# Altium PCB PCB1.PcbDoc
Units mm, origin at the board's own origin, x right, y up, seen from the top; angles counter-clockwise.
Board outline 53.21 x 19.56 mm, 2 copper layers (Top Layer, Bottom Layer); 60 components, 38 nets, 218 pads, 76 vias.
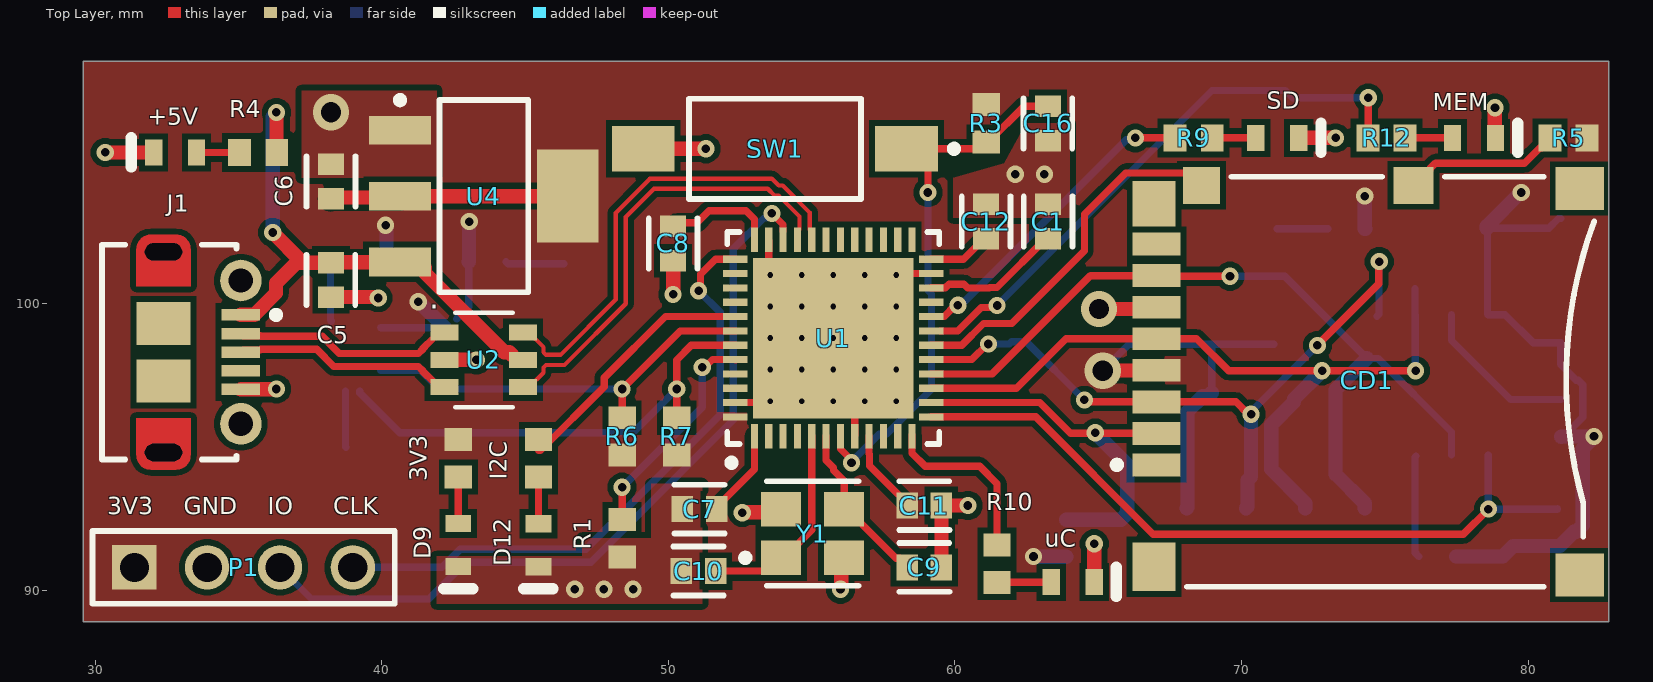
[diagram p0: Top Layer view]
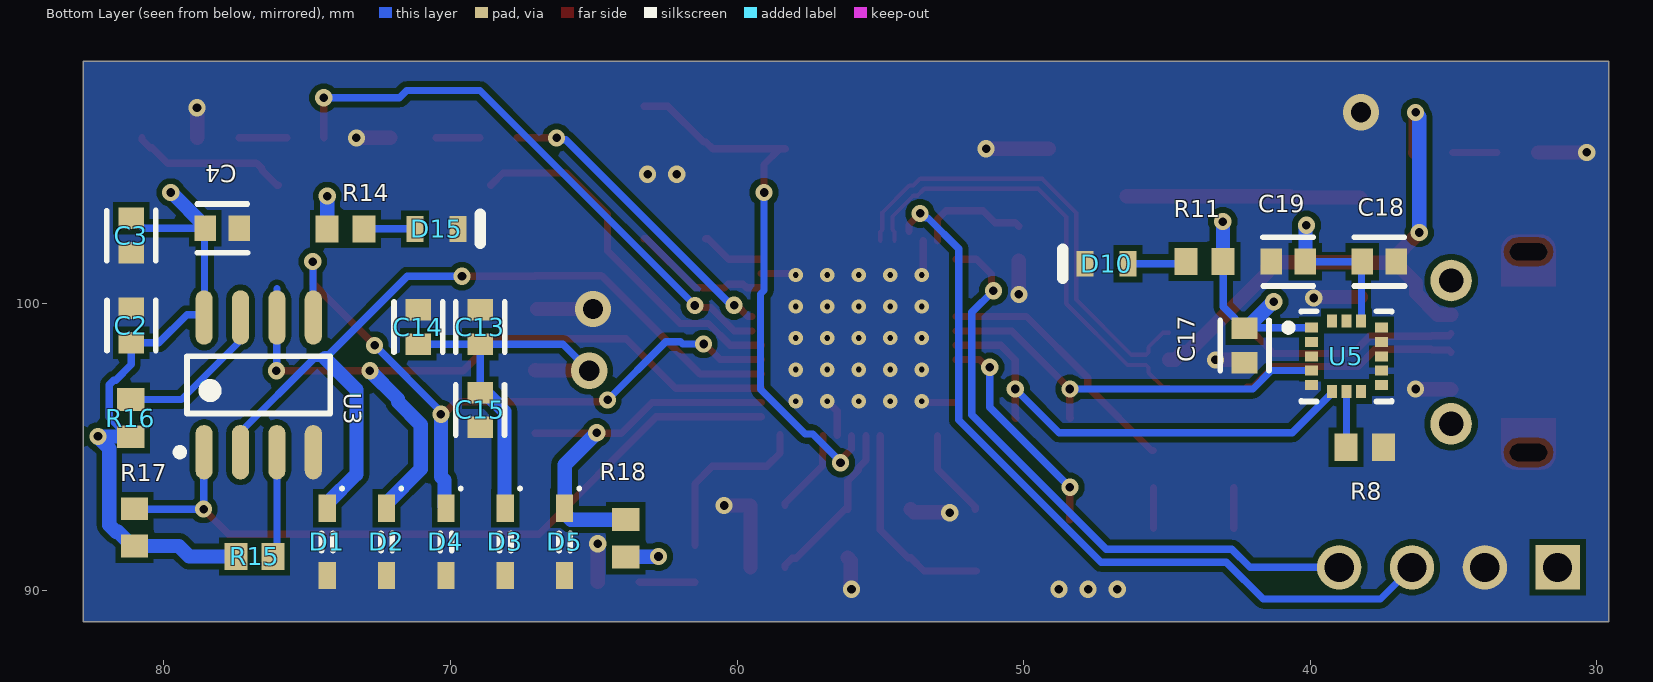
[diagram p1: Bottom Layer view, seen from below]
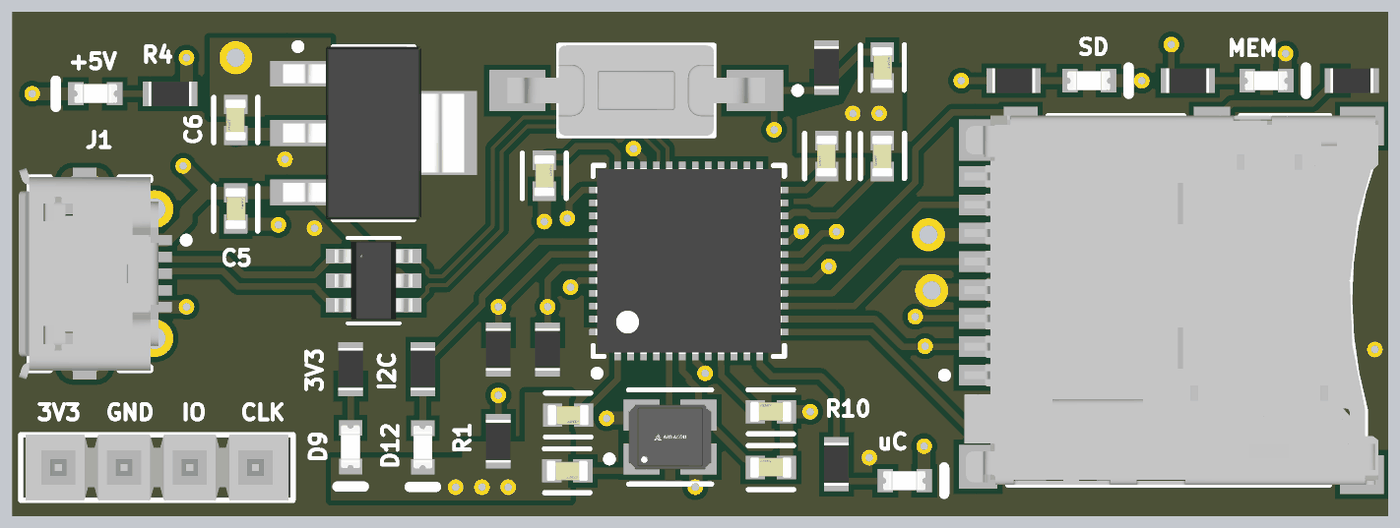
[diagram p2: 3D render of the assembled board from above, using the file's embedded part models]
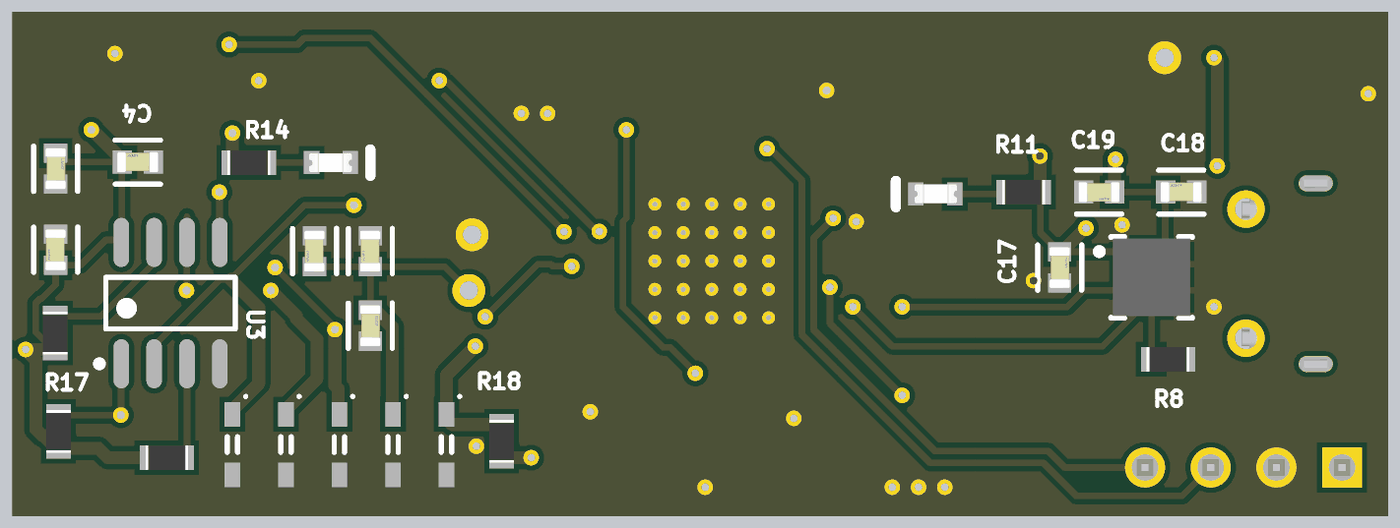
[diagram p3: 3D render of the assembled board from below, using the file's embedded part models]

## Layer stack, top to bottom
Top Solder: solder mask 0.0102, Solder Resist, Dk 3.5
Top Layer: signal copper 0.0356
Dielectric 1: dielectric 0.32, FR-4, Dk 4.8
Bottom Layer: signal copper 0.0356
Bottom Solder: solder mask 0.0102, Solder Resist, Dk 3.5

## Board outline
29.591,108.458 82.804,108.458 82.804,88.9 29.591,88.9

## Design rules (kind name [scope] priority, off if disabled: settings)
Clearance [All] p1: gap=0.2 ignorepadtopadclearanceinfootprint=FALSE except(0: Arc-Hole Track-Hole SMDPad-Hole THPad-Hole Via-Hole Fill-Hole Poly-Hole Region-Hole Text-Hole; 0.15: Arc-SMDPad Track-SMDPad SMDPad-SMDPad)
DiffPairsRouting [All] p1: maxlimit=0.254 minlimit=0.15 mostfreqgap=0.2 toplayer_minwidth=0.15 toplayer_maxwidth=0.381 toplayer_prefwidth=0.254 bottomlayer_minwidth=0.15 bottomlayer_maxwidth=0.381 bottomlayer_prefwidth=0.254 maxuncoupledlength=12.7
MinimumSolderMaskSliver [All] p1: minsoldermaskwidth=0.15
PolygonConnect [All] p1: connectstyle=Direct reliefconductorwidth=0.254 reliefentries=4 polygonreliefangle="90 Angle" airgapwidth=0.254
RoutingVias [All] p1: holewidth=0.3 width=0.6 viastyle="Through Hole" minholewidth=0.3 minwidth=0.6 maxholewidth=0.3 maxwidth=0.6 viatemplateguid#1={E1997C0E-6A4B-44C1-AED1-B057834B2BD9} viatemplatename#1=v50h20
SilkToSolderMaskClearance [IsPad] p1: minsilkscreentomaskgap=0.15 clearancetoexposedcopper=TRUE
SolderMaskExpansion [All] p1: expansion=0 istentingtop=FALSE
Width [All] p1: maxlimit=10 minlimit=0.254 preferedwidth=0.254 minimp=50.000000 maximp=50.000000 favimp=50.000000
27 further rules are at their usual default settings.

## Classes and differential pairs
component class Sheet2: C17 C18 C19 D10 D12 D15 I2C MEM R6 R7 R8 R9 R10 R11 R12 R14 SD U5 uC
component class Sheet1: 3V3 +5V C1 C2 C3 C4 C5 C6 C7 C8 C9 C10 C11 C12 C13 C14 C15 C16 CD1 D1 D2 D3 D4 D5 D9 J1 P1 R1 R3 R4 R5 R15 R16 R17 R18 SW1 U1 U2 U3 U4 Y1
differential pair USB: +USB_P -USB_N
differential pair USB_CONN: +USB_CONN_P -USB_CONN_N

## Components (designator, comment, footprint, x,y, rotation, side; value= is the part's Value field where it differs from the comment)
3V3 "1k" RESC1609X50X30NL8T20 42.672,94.615 r90 top (schematic designator R2)
+5V "0603 LED" "0603 LED" 32.791,105.283 r180 top (schematic designator D8)
C1 "2.2u" FP-C0603C-CF-MFG 63.246,102.87 r90 top value="0.10 μF"
C2 "0.1u" FP-C0603C-CF-MFG 81.134,99.241 r90 bottom value="0.10 μF"
C3 "0.1u" FP-C0603C-CF-MFG 81.134,102.381 r270 bottom value="0.10 μF"
C4 "0.1u" FP-C0603C-CF-MFG 77.959,102.635 r180 bottom value="0.10 μF"
C5 "0.1u" FP-C0603C-CF-MFG 38.227,100.838 r270 top value="0.10 μF"
C6 "10u" FP-C0603C-CF-MFG 38.227,104.267 r90 top value="0.10 μF"
C7 "0.1u" FP-C0603C-CF-MFG 51.089,92.837 r180 top value="0.10 μF"
C8 "0.1u" FP-C0603C-CF-MFG 50.165,102.108 r270 top value="0.10 μF"
C9 "26p" FP-C0603C-CF-MFG 58.928,90.805 r0 top value="0.10 μF"
C10 "26p" FP-C0603C-CF-MFG 51.054,90.678 r180 top value="0.10 μF"
C11 "0.1u" FP-C0603C-CF-MFG 58.928,92.964 r0 top value="0.10 μF"
C12 "0.1u" FP-C0603C-CF-MFG 61.087,102.87 r90 top value="0.10 μF"
C13 "0.1u" FP-C0603C-CF-MFG 68.961,99.187 r90 bottom value="0.10 μF"
C14 "0.1u" FP-C0603C-CF-MFG 71.12,99.187 r90 bottom value="0.10 μF"
C15 "0.1u" FP-C0603C-CF-MFG 68.961,96.301 r270 bottom value="0.10 μF"
C16 "0.1u" FP-C0603C-CF-MFG 63.246,106.299 r270 top value="0.10 μF"
C17 "0.1u" FP-C0603C-CF-MFG 42.291,98.552 r270 bottom value="0.10 μF"
C18 "0.1u" FP-C0603C-CF-MFG 37.592,101.473 r180 bottom value="0.10 μF"
C19 "0.1u" FP-C0603C-CF-MFG 40.767,101.473 r0 bottom value="0.10 μF"
CD1 "502774-0891" MOLX-502774-0891_V 74.422,97.282 r90 top
D1 "DESD5V0U1BA-7" SOD-323 74.295,91.694 r90 bottom
D2 "DESD5V0U1BA-7" SOD-323 72.225,91.694 r90 bottom
D3 "DESD5V0U1BA-7" SOD-323 68.085,91.694 r90 bottom
D4 "DESD5V0U1BA-7" SOD-323 70.155,91.694 r90 bottom
D5 "DESD5V0U1BA-7" SOD-323 66.015,91.694 r90 bottom
D9 "0603 LED" "0603 LED" 42.672,91.591 r270 top
D10 "0603 LED" "0603 LED" 47.105,101.399 r0 bottom
D12 "0603 LED" "0603 LED" 45.466,91.579 r270 top
D15 "0603 LED" "0603 LED" 70.485,102.616 r180 bottom
I2C "100" RESC1609X50X30NL8T20 45.466,94.615 r90 top (schematic designator R13)
J1 "105017-0001" USB-MICRO-B_V 33.735,98.314 r270 top
MEM "0603 LED" "0603 LED" 78.105,105.791 r0 top (schematic designator D11)
P1 "MTSW-104-07-F-S-170" SMTC-MTSW-104-07-X-S-170 31.369,90.805 r0 top
R1 "10k" RESC1609X50X30NL8T20 48.387,91.821 r270 top
R3 "10k" RESC1609X50X30NL8T20 61.087,106.299 r270 top
R4 "1k" RESC1609X50X30NL8T20 35.687,105.283 r0 top
R5 "4.7k" RESC1609X50X30NL8T20 81.407,105.791 r0 top
R6 "4k7" RESC1609X50X30NL8T20 48.387,95.377 r270 top
R7 "4k7" RESC1609X50X30NL8T20 50.292,95.377 r270 top
R8 "10k" RESC1609X50X30NL8T20 38.1,94.996 r0 bottom
R9 "100" RESC1609X50X30NL8T20 68.326,105.791 r180 top
R10 "100" RESC1609X50X30NL8T20 61.468,90.932 r90 top
R11 "100" RESC1609X50X30NL8T20 43.688,101.473 r180 bottom
R12 "100" RESC1609X50X30NL8T20 75.057,105.791 r180 top
R14 "100" RESC1609X50X30NL8T20 73.66,102.616 r0 bottom
R15 "10k" RESC1609X50X30NL8T20 76.835,91.186 r0 bottom
R16 "10k" RESC1609X50X30NL8T20 81.153,96.012 r270 bottom
R17 "4.7k" RESC1609X50X30NL8T20 81.026,92.202 r270 bottom
R18 "4.7k" RESC1609X50X30NL8T20 63.881,91.821 r270 bottom
SD "0603 LED" "0603 LED" 71.247,105.791 r0 top (schematic designator D13)
SW1 "FSMSMTR" TECO-FSMSMTR_V 53.721,105.41 r180 top
U1 "STM32F401CBU6TR" "UQFN48 P0.5mm" 55.753,98.806 r90 top
U2 "USBLC6-2SC6" SOT23-6L_STM 43.561,98.044 r0 top
U3 "FLASH 1MBit" "SOIC8 3.9mm" 76.689,97.174 r90 bottom
U4 "LD1117S33TR" SOT230P700X180-4N 43.561,103.759 r0 top
U5 "LIS3DHTR" FP-LGA-16-7983231-MFG 38.735,98.171 r180 bottom
uC "0603 LED" "0603 LED" 64.11,90.297 r0 top (schematic designator D14)
Y1 "ABM8G-16.000MHZ-18-D2Y-T" FP-ABM8G-MFG 55.034,91.987 r0 top

## Footprints (in the part's own frame and the unit in brackets; to place one, negate y for a bottom-side part, rotate by r counter-clockwise, add the part's x,y. Pads: shape width x height; smd on the part's side, far side on the other; paste and mask are expansions set on the pad)
"0603 LED" [mm]
  rect 0.6x0.9 smd: 1(-0.75,0) 2(0.75,0)
  silkscreen extent 1.52,-0.51 1.52,0.51, body extent -0.84,-0.37 0.81,0.36, height 0.68
FP-ABM8G-MFG [mm]
  rect 1.4x1.2 smd paste+0 mask+0: 1(-1.1,-0.85) 2(1.1,-0.85) 3(1.1,0.85) 4(-1.1,0.85)
  silkscreen extent -2.47,-1.83 1.6,1.83, body extent -1.9,-1.55 1.9,1.55, height 0.25
FP-C0603C-CF-MFG [mm]
  rect 0.75x0.9 smd paste+0 mask+0: 1(-0.6,0) 2(0.6,0)
  silkscreen extent -0.87,-0.85 0.88,0.85, body extent -1.2,-0.6 1.2,0.6, height 0.25
FP-LGA-16-7983231-MFG [mm]
  rect 0.45x0.35 smd paste-1000 mask+0: 1(-1.225,1) 2(-1.225,0.5) 3(-1.225,0) 4(-1.225,-0.5) 5(-1.225,-1) 9(1.225,-1) 10(1.225,-0.5) 11(1.225,0) 12(1.225,0.5) 13(1.225,1)
  rect 0.35x0.45 smd paste-1000 mask+0: 6(-0.5,-1.225) 7(0,-1.225) 8(0.5,-1.225) 14(0.5,1.225) 15(0,1.225) 16(-0.5,1.225)
  silkscreen extent -2.15,-1.58 1.58,1.58, body extent -1.5,-1.5 1.5,1.5, height 1
MOLX-502774-0891_V [mm] "SMD, 14-Leads, Body 15x14.3mm, Pitch 1.1mm"
  rect 0.8x1.68 smd: 1(-2.9,7.385) 2(-1.8,7.385) 3(-0.7,7.385) 4(0.4,7.385) 5(1.5,7.385) 6(2.6,7.385) 7(3.7,7.385) 8(4.8,7.385)
  rect 1.29x1.3 smd: 9(6.855,5.825)
  rect 1.29x1.4 smd: 10(6.855,-1.575)
  rect 1.5x1.7 smd: 11(6.75,-7.375) 12(-6.75,-7.375)
  rect 1.7x1.5 smd: 13(-6.45,7.475)
  rect 1.6x1.5 smd: 14(6.21,7.475)
  silkscreen extent -7.15,-7.88 7.15,8.9, body extent -7.15,-8 7.15,8, height 1.78
RESC1609X50X30NL8T20 [mm] "Chip Resistor, 2-Leads, Body 1.65x0.95mm, IPC Medium Density"
  rect 0.8x0.95 smd: 1(-0.65,0) 2(0.65,0)
  body extent -0.82,-0.48 0.82,0.48, height 0.5
SMTC-MTSW-104-07-X-S-170 [mm] "Assembly .025\" [.64] SQ Post Terminal Strip, 1x4 Pins, Vertical, 2.54mm Pitch, Male"
  rect 1.55x1.55 hole 1.02: 1(0,0)
  round 1.55 hole 1.02: 2(2.54,0) 3(5.08,0) 4(7.62,0)
  silkscreen extent -1.46,-1.27 9.08,1.27, body extent -1.27,-1.27 8.89,1.27, height 6.86
SOD-323 [mm] "Chip Diode, 2-Leads, Body 2.70x0.45mm, IPC Medium Density"
  rect 0.95x0.6 smd: 1(-1.175,0) 2(1.175,0)
  silkscreen extent -0.3,-0.56 1.91,0.2, body extent -1.3,-0.67 1.3,0.67, height 1.1
"SOIC8 3.9mm" [mm]
  oval 1.9x0.6 smd: 1(-2.35,1.905) 2(-2.35,0.635) 3(-2.35,-0.635) 4(-2.35,-1.905) 5(2.35,-1.905) 6(2.35,-0.635) 7(2.35,0.635) 8(2.35,1.905)
  silkscreen extent -2.47,-2.5 1,2.88, body extent -3,-2.45 3,2.45, height 1.75
SOT23-6L_STM [mil]
  rect 38.5x22 smd paste+0 mask+0: 1(-53.75,37.4) 2(-53.75,0) 3(-53.75,-37.4) 4(53.75,-37.4) 5(53.75,0) 6(53.75,37.4)
  silkscreen extent -40,-65 40,65, body extent -59,-60 59,60, height 57
SOT230P700X180-4N [mm] "SOT223, 4-Leads, Body 6.50x7.00mm (avg), Pitch 2.30mm, IPC Medium Density"
  rect 2.15x1 smd: 1(-2.925,2.3) 2(-2.925,0) 3(-2.925,-2.3)
  rect 2.15x3.25 smd: 4(2.925,0)
  silkscreen extent -3.05,-3.35 1.55,3.47, body extent -3.5,-3.35 3.5,3.35, height 1.8
TECO-FSMSMTR_V [mm] "SMD, 2-Leads, Body 6x3.5mm, Pitch 9.19mm"
  rect 2.2x1.6 smd: 1(-4.595,0)
  rect 2.18x1.6 smd: 2(4.595,0)
  silkscreen extent -6.37,-1.75 3,1.75, body extent -4.98,-1.75 4.98,1.75, height 4.4
"UQFN48 P0.5mm" [mm] "QFN, 48-Leads, Body 7.00x7.00mm, Pitch 0.50mm, Thermal Pad 5.60x5.60mm, IPC Medium Density"
  rect 0.85x0.25 smd: 1(-3.425,2.75) 2(-3.425,2.25) 3(-3.425,1.75) 4(-3.425,1.25) 5(-3.425,0.75) 6(-3.425,0.25) 7(-3.425,-0.25) 8(-3.425,-0.75) 9(-3.425,-1.25) 10(-3.425,-1.75) 11(-3.425,-2.25) 12(-3.425,-2.75) 25(3.425,-2.75) 26(3.425,-2.25) 27(3.425,-1.75) 28(3.425,-1.25) 29(3.425,-0.75) 30(3.425,-0.25) 31(3.425,0.25) 32(3.425,0.75) 33(3.425,1.25) 34(3.425,1.75) 35(3.425,2.25) 36(3.425,2.75)
  rect 0.25x0.85 smd: 13(-2.75,-3.425) 14(-2.25,-3.425) 15(-1.75,-3.425) 16(-1.25,-3.425) 17(-0.75,-3.425) 18(-0.25,-3.425) 19(0.25,-3.425) 20(0.75,-3.425) 21(1.25,-3.425) 22(1.75,-3.425) 23(2.25,-3.425) 24(2.75,-3.425) 37(2.75,3.425) 38(2.25,3.425) 39(1.75,3.425) 40(1.25,3.425) 41(0.75,3.425) 42(0.25,3.425) 43(-0.25,3.425) 44(-0.75,3.425) 45(-1.25,3.425) 46(-1.75,3.425) 47(-2.25,3.425) 48(-2.75,3.425)
  rect 5.6x5.6 smd: 49(0,0)
  silkscreen extent -4.47,-3.7 3.7,3.7, body extent -3.6,-3.6 3.6,3.6, height 0.6
USB-MICRO-B_V [mm] "USB, MICRO B, Body 7.491x4.695 mm, Pitch 0.65 mm"
  rect 0.4x1.35 smd: 1(-1.3,1.35) 2(-0.65,1.35) 3(0,1.35) 4(0.65,1.35) 5(1.3,1.35)
  round 1.45 hole 0.85: 6(-2.5,1.35) 7(2.5,1.35)
  rrect50% 0x0 hole 0.6 slot 1.3 at 90 deg: 8(-3.5,-1.35) 11(3.5,-1.35)
  rect 1.5x1.9 smd: 9(-1,-1.35) 10(1,-1.35)
  Top Layer circle w0.5: c-3.6,-1.8 r0.25
  Top Layer circle w0.5: c-3.6,-0.9 r0.25
  Top Layer circle w0.5: c3.6,-1.8 r0.25
  Top Layer circle w0.5: c3.6,-0.9 r0.25
  Top Layer region: -3.6,-1.8 -3.6,-0.9 -4.1,-0.9 -4.1,-1.8
  Top Layer region: 3.6,-0.9 3.6,-1.8 4.1,-1.8 4.1,-0.9
  Top Layer region: 2.3,-0.4 2.3,-2.3 3.6,-2.3 3.6,-0.4
  Top Layer region: -2.3,-2.3 -2.3,-0.4 -3.6,-0.4 -3.6,-2.3
  silkscreen extent -3.75,-3.5 3.75,2.7, body extent -4.1,-3.9 4.1,1.5, height 2.67

## Part data
3V3 I2C R1 R3 R4 R5 R6 R7 R8 R9 R10 R11 R12 R14 R15 R16 R17 R18: library part CMP-1666-00005-4, "Chip Resistor, 10 KOhm, +/- 1%, 100 mW, -55 to 155 degC, 0603 (1608 Metric), RoHS, Tape and Reel", Manufacturer="Vishay Semiconductor", Max Operating Temperature="155 degC", Min Operating Temperature="-55 degC", Package Quantity=5000, Voltage Rating="75 V", ComponentLink1Description="Manufacturer URL", ComponentLink1URL=http://www.vishay.com/, ComponentLink2Description=Datasheet, ComponentLink2URL=https://datasheet.ciiva.com/11809/0900766b80d98afc-11809037.pdf, DatasheetVersion=06/2012, Height="0.45 mm", Length="1.55 mm", Mounting Technology="Surface Mount", PackageDescription="2-Pin Surface Mount Device, Body 1.575 x 0.85 mm", PackageReference=0603, Packaging="Tape and Reel", REACH SVHC=Unknown, RoHSCompliant=true
C1 C2 C3 C4 C5 C6 C7 C8 C9 C10 C11 C12 C13 C14 C15 C16 C17 C18 C19: library part CMP-2006-03061-2, "CAP CER 0.1UF 50V X7R 0603", Capacitance="0.10 μF", Manufacturer=KEMET, Manufacturer Part Number=C0603C104K5RACTU, Package=C0603C-CF, Temperature="-55°C to +125°C", Temperature Characteristic=X7R, Temperature Coefficient=30ppm/°C, Temperature Range High=+125°C, Temperature Range Low=-55°C, Tolerance=0.1, Voltage Rating="50 V", Automotive=Yes, Automotive Grade="Grade 1", Category=Cap, ComponentLink2Description=Datasheet, ComponentLink2URL=https://api.kemet.com/component-edge/download/datasheet/C0603C100J5GACAUTO.pdf, Device Class L1="Passive Components", Device Class L2=Capacitors, Device Class L3="Ceramic Capacitors", Digikey Description="CAP CER 0.1UF 50V X7R 0603", Height=0.87mm, Lead Free=Yes, Material=Ceramic, Octopart=https://octopart.com/c0603c104k5ractu-kemet-139244, RoHS=TRUE
CD1: library part CMP-2000-05248-1, "Micro SD Memory Card Connector, 0.5 A, 10 V (DC), -25 to 85 degC, 8-Pin SMT, RoHS, Tape and Reel", Manufacturer=Molex, Standard Package=1, 3D Model=502774-0891.stp, Card Type=SecureDigital-microSD™, Catalog Drawings=502774-0891, Category=Connectors,Interconnects, Connector Type=ConnectorandEjector, Contact Finish=Gold, Contact Finish Thickness=20µin(0.51µm), Datasheet URL=https://datasheet.ciiva.com/1104/1499551-1104671.pdf, Datasheet Version="Rev. D, 04/2004", Ejector Side=-, Family=MemoryConnectors-PCCardSockets, Features=Switch, Height Above Board="0.071\"(1.80mm)", Insertion, Removal Method=PushIn,PushOut, Manufacturer URL=http://www.molex.com/, Mounting Feature=Reverse-Bottom, Mounting Type=SurfaceMount,RightAngle, Number of Positions=10(8+2), Online Catalog=microSD™Series, Other Names=WM24066DKR, Packaging=Digi-Reel, RoHS Information=502774-0891CertofCompliance, Series=502774
D1 D2 D3 D4 D5: "No Description Available", Mfr_Name="Diodes Inc", Copyright="Copyright (C) 2023 Ultra Librarian. All rights reserved.", Manufacturer_Part_Number=DESD5V0U1BA-7, RefDes=RefDes, Type=DEV
J1: library part CMP-2000-05827-1, "Micro-USB B Receptacle, Right Angle, Bottom Mount, Surface Mount, with Solder Tabs, -30 to 85 degC, 5-Pin USB, RoHS, Tape and Reel", Manufacturer=Molex, Package Description="5-Leads USB, Micro B, Body 7.5 x 5 mm, Pitch 0.65 mm", Package Reference=MICRO-B, Package Version="Rev. F, 12/2012", Standard Package=1, Voltage - Max=30V, 3D Model=105017-0001.stp, Catalog Drawings=1050170001, Category=Connectors,Interconnects, Circuits=5, Connector Type=USB-microB, Datasheet URL=http://www.molex.com/elqNow/elqRedir.htm?ref=http://www.molex.com/webdocs/datasheets/pdf/en-us/1050170001_IO_CONNECTORS.pdf, Datasheet Version=03/2016, Family=USB,DVI,HDMIConnectors, Featured Product=Micro-USBConnectorsUSBConnectors, Features=Shielded,SolderRetention, Gender=Receptacle, Ingress Protection=-, Manufacturer URL=http://www.molex.com/, Mating Products=WM17145-ND-CABLEMICROUSBBTOSTDA1.0MWM17147-ND-CABLEMICROUSBBTOSTDA2.0MWM17146-ND-CABLEMICROUSBBTOSTDA1.5M, Mounting Technology=SurfaceMount, Mounting Type=BoardCutout,SurfaceMount,RightAngle, Number of Contacts=5, Online Catalog=Molex-MicroUSB, Other Names=WM1399DKR, Package URL=http://www.molex.com/pdm_docs/sd/1050170001_sd.pdf, Packaging=Digi-Reel®, PCN Assembly/Origin=ResinSupplier21/Oct/2015, RoHS Information=1050170001CertofCompliance, Series=-, Specifications=-
P1: library part CMP-1024-00106-1, "Modified .025\" SQ Post Header, Through-hole, Vertical, -55 to 125 degC, 2.54 mm Pitch, 4-Pin, Male, RoHS", Manufacturer=Samtec, Temperature Range="-55 to 125 degC", ComponentLink1Description="Manufacturer URL", ComponentLink1URL=http://www.samtec.com, ComponentLink2Description=Datasheet, ComponentLink2URL=http://www.samtec.com/documents/webfiles/pdf/MTSW.PDF, ComponentLink3Description="Package Specification", ComponentLink3URL=http://www.samtec.com/documents/webfiles/cpdf/MTSW-XXX-XX-X-X-XXXX-XX-XXX-MKT1.pdf, DatasheetVersion=F-214, Mounting Technology=Through-hole, Orientation=Vertical, PackageDescription="Assembly .025\" [.64] SQ Post Terminal Strip", PackageReference=MTSW-104-07-X-S-170, PackageVersion="BI, 2/1987", PartNumber=MTSW-104-07-F-S-170, Pitch="2.54 mm", RoHS=True
SW1: library part CMP-2000-07501-1, "FSMSM Push Button Switch, 50 mA, -35 to 85 degC, 2-Pin SMD, RoHS, Tape and Reel", Case\/Package=SMD/SMT, Contact Current Rating=50mA, Contact Resistance=100mOhm, Manufacturer="TE Connectivity", Max Operating Temperature=85degC, Max Voltage Rating (DC)=12V, Min Operating Temperature=-35degC, Operating Force=180gf, Package Description="2-Pin Surface Mount Device, Body 6 x 3.5 mm, Pitch 9.19 mm", Package Quantity=1800, Voltage Rating (DC)=24V, Actuator Length=1.07mm, Actuator Material=Polyamide, Contact Material=Brass, Contact Plating=Silver, Current Rating=50mA, Datasheet URL=http://www.te.com/commerce/DocumentDelivery/DDEController?Action=showdoc&DocId=Customer+Drawing%7F1437566-3%7FC2%7Fpdf%7FEnglish%7FENG_CD_1437566-3_C2_1437566_3_1_c.dwg.pdf%7F1437566-4, Datasheet Version="Rev. C2, 08/2014", Electrical Life=20000Cycles, ELV=Compliant, Illumination Type=Illuminated, Lead Free=LeadFree, Manufacturer URL=http://www.te.com/, Mechanical Life=20000Cycles, Mount=SurfaceMount, Mounting Technology=SurfaceMount, Orientation=Straight, Package Reference=FSMSMTR, Packaging=TapeandReel, REACH SVHC=Unknown, RoHSCompliant=true, Switch Travel=0.25mm, Termination=GullWing, Throw Configuration=SPST
U1: library part CMP-0243-00136-1, "ARM Cortex-M4 32-bit MCU+FPU, 128 KB Flash, 64 KB Internal RAM, 36 I/Os, 48-Pin UFQFPN, -40 to 85 degC, Tape and Reel", I/Os (High Current)=36, Manufacturer=STMicroelectronics, Operating Frequency(F) (Processor speed) (MHz)=84, Package Description=UFQFPN48, Package Reference="48-Pin Ultra Thin Fine Pitch Quad Flat No-Lead, 7 x 7 x 0.6 mm Body, 0.5 mm Pitch, Exposed Pad", Supply Voltage(Vcc) min (V)=1.7, ComponentLink1Description="Manufacturer URL", ComponentLink1URL=http://www.st.com/, ComponentLink2Description=Datasheet, ComponentLink2URL=http://www.st.com/st-web-ui/static/active/en/resource/technical/document/datasheet/DM00086815.pdf, Core="ARM Cortex-M4", DatasheetVersion="Rev. 5", FLASH Size (Prog) (kB)=128, Internal RAM Size (kB)=64, Manufacturer Part Number=STM32F401CBU6TR, Mounting Technology="Surface Mount", Packing="Tape and Reel"
U2: "No Description Available", Mfr_Name=STMicroelectronics, Copyright="Copyright (C) 2023 Ultra Librarian. All rights reserved.", Manufacturer_Part_Number=USBLC6-2SC6, RefDes=RefDes, Type=DEV
U3: library part SST25VF010A-33-4I-SAE
U4: "Fixed Positive LDO Regulator, 3.3V, 1.2V Dropout, BIPolar, PDSO4", Case/Package=SOP, Dropout Voltage1-Max=1.2V, Dropout Voltage1-Nom=1.1V, Input Voltage Absolute-Max=15V, Manufacturer=STMicroelectronics, Min Input Voltage=4.75V, Operating Temperature, TJ-Max=125°C, Operating Temperature, TJ-Min=0°C, Output Current1-Max=1.3A, Output Voltage1-Max=3.365V, Output Voltage1-Min=3.235V, Output Voltage1-Nom=3.3V, Package Body Material=Plastic, Package Shape=Rectangular, Package Style="SMALL OUTLINEMeter", Peak Reflow Temperature (Cel)=260°C, Supplier Part Number=511-LD1117S33, Time @ Peak Reflow Temperature-Max (s)=30s, Voltage Tolerance-Max=2%, Adjustability=FIXED, Category="Voltage Regulators - Linear", Channels=1, ComponentLink1Description=https://datasheet.ciiva.com:443/pdfs/VipMasterIC/IC/SGST/SGST-S-A0009691890/SGST-S-A0009691890-1.pdf?src-supplier=IHS+Markit, ComponentLink1URL=https://datasheet.ciiva.com:443/pdfs/VipMasterIC/IC/SGST/SGST-S-A0009691890/SGST-S-A0009691890-1.pdf?src-supplier=IHS+Markit, ComponentLink2Description=https://datasheet.ciiva.com/19478/1390240-19478097.pdf?src-supplier=Jameco, ComponentLink2URL=https://datasheet.ciiva.com/19478/1390240-19478097.pdf?src-supplier=Jameco, ComponentLink3Description=https://datasheet.ciiva.com/1511/1776449-1511573.pdf?src-supplier=Element14, ComponentLink3URL=https://datasheet.ciiva.com/1511/1776449-1511573.pdf?src-supplier=Element14, ComponentLink4Description=https://datasheet.ciiva.com/7992/1776449-7992621.pdf?src-supplier=Element14, ComponentLink4URL=https://datasheet.ciiva.com/7992/1776449-7992621.pdf?src-supplier=Element14, ComponentLink5Description=https://datasheet.ciiva.com/28652/1776449-28652462.pdf?src-supplier=Element14, ComponentLink5URL=https://datasheet.ciiva.com/28652/1776449-28652462.pdf?src-supplier=Element14, ComponentLink6Description=https://datasheet.ciiva.com/2041/cd00000544-2041942.pdf?src-supplier=Digi-Key, ComponentLink6URL=https://datasheet.ciiva.com/2041/cd00000544-2041942.pdf?src-supplier=Digi-Key, ComponentLink7Description=https://datasheet.ciiva.com/2041/cd00000544-2041941.pdf?src-supplier=Digi-Key, ComponentLink7URL=https://datasheet.ciiva.com/2041/cd00000544-2041941.pdf?src-supplier=Digi-Key, ComponentLink8Description=https://datasheet.ciiva.com/2041/cd00000544-2041943.pdf?src-supplier=Digi-Key, ComponentLink8URL=https://datasheet.ciiva.com/2041/cd00000544-2041943.pdf?src-supplier=Digi-Key, ComponentLink9Description=https://datasheet.ciiva.com/16396/cd00000544-16396459.pdf?src-supplier=Future+Electronics, ComponentLink9URL=https://datasheet.ciiva.com/16396/cd00000544-16396459.pdf?src-supplier=Future+Electronics, Height - Seated (Max)=1.9mm, JESD-30 Code=R-PDSO-G3, JESD-609 Code=e3, Length=6.5mm, Line Regulation-Max=0.006%, Load Regulation-Max=0.01%, Manufacturer Part Number=LD1117S33TR, Max Supply Voltage=15V, Moisture Sensitivity Level=1, Number of Outputs=1, Packaging="Tape and Reel", Pins=3, Pricing="1=0.64, 10=0.53, 50=0.53, 100=0.386, 1000=0.291, 10000=0.229 (USD)", Qualification Status="Not Qualified", Reach SVHC Compliant=No, Regulator Type="FIXED POSITIVE SINGLE OUTPUT LDO REGULATOR", RoHS=Yes, RoHS Compliant=Yes, Stock=175247, Supplier=Mouser, Surface Mount=Yes, Technology=BIPOLAR, Terminal Finish=Tin, Terminal Form="Gull Wing", Terminal Pitch=2.3mm, Terminal Position=DUAL, Width=3.5mm
U5: library part CMP-0234-00055-6, "ACCEL 2-16G I2C/SPI 16LGA", Case/Package=LGA, Max Operating Temperature=85°C, Max Supply Voltage=3.6V, Min Operating Temperature=-40°C, Min Supply Voltage=1.71V, Operating Supply Current=11uA, Operating Supply Voltage=2.5V, Package Quantity=1, Axis="X, Y, Z", Bandwidth=5kHz, Contact Plating=Gold, Depth=3mm, Height=1mm, Interface=I2C, Lead Free="Lead Free", Length=3mm, Max Supply Voltage (DC)=3.6V, Min Supply Voltage (DC)=1.71V, Number of Pins=16, Output Type=Digital, Packaging="Tape and Reel", Radiation Hardening=No, REACH SVHC="No SVHC", Resolution=16b, RoHS Compliant=Yes, Sensor Type="3 Axis", Series=-, Width=3mm
Y1: library part CMP-27762-006537-2, "Crystal 16MHz ±20ppm (Tol) ±30ppm (Stability) 18pF FUND 80Ω 4-Pin SMD T/R", Case/Package=CSMD, ESR (Equivalent Series Resistance)=80R, Frequency=16MHz, Frequency Stability=30ppm, Frequency Tolerance=20ppm, Load Capacitance=18pF, Max Operating Temperature=85°C, Min Operating Temperature=-40°C, Operating Frequency="16 MHz", Package Quantity=1000, Depth=2.5mm, Height=1mm, Lead Free="Lead Free", Length=3.2mm, Mount="Surface Mount", Number of Pins=4, Packaging="Tape and Reel", Radiation Hardening=No, Series=ABM8G, Series Resistance=80R, Termination=SMD/SMT, Tolerance=20ppm, Width=2.5mm

## Via types
v1: diameter 0.6, hole 0.3, Top Layer to Bottom Layer, 48 vias
v2: diameter 0.5, hole 0.2, Top Layer to Bottom Layer, 25 vias
v3: diameter 1.27, hole 0.711, Top Layer to Bottom Layer, 3 vias

## Nets (pads, with @x,y where several pads share a name; then routed paths per layer and width w, separated by ;. In a path a pad name is that pad's centre, name@x,y a point inside that pad or via, vN(x,y) a via of type N, cw(c..) or ccw(c..) an arc to the next point about the centre after c; other vN are vias at no path point)
3V3: 3V3.2 C2.1 C3.1 C4.1 C6.1 C7.1 C8.1 C11.1 C12.1 C13.1 C14.1 C15.1 C17.1 C18.1 C19.1 CD1.4 D3.2 P1.1 R3.1 R5.2 R6.2 R7.2 R11.2 R14.2 R15.2 R16.2 R17.2 R18.2 U1.1 U1.9 U1.24 U1.36 U1.48 U3.8 U4.2 U4.4 U5.1 U5.14 | length 73.4
  Top Layer w0.254: C8.1 50.286,102.829 50.996,102.829 51.418,103.251 52.705,103.251 53.003,102.953 U1.36@53.003,102.206 ; C7.1 51.689,92.912 53.003,94.226 U1.1@53.003,95.406 ; U1.9@57.003,95.406 57.003,94.76 57.015,94.748 57.015,94.352 58.328,93.039 C11.1 ; U1.24@59.153,101.556 60.298,101.556 61.012,102.27 C12.1
  Top Layer w0.5: C6.1 38.273,103.713 40.665,103.713 40.711,103.759 U4.4@46.411,103.759 ; v3(65.151,97.663) 65.16,97.672 67.028,97.672 CD1.4
  Bottom Layer w0.254: U5.14 38.213,99.417 38.213,101.451 C18.1 C19.1 ; U5.1 39.97,99.161 42.206,99.161 42.216,99.152 C17.1 ; v1(41.275,100.076) v1@41.292,100.076 ; C17.1@42.614,99.475 43.038,99.899 R11.2 ; v3(65.151,97.663) 66.075,98.587 C13.1 ; C15.1 C13.1 ; C14.1 C13.1 ; C3.1 81.059,102.981 80.713,102.635 C4.1 78.577,102.617 78.577,99.641 78.594,99.624 79.192,99.624 80.175,98.641 C2.1 81.134,97.885 81.68,97.339 81.743,97.339 81.905,97.177 81.905,96.039 R16.2@81.235,95.37
  Bottom Layer w0.5: v1(40.132,102.743) 40.132,102.716 40.167,102.681 C19.1 ; v1@41.292,100.076 C17.1@42.206,99.161 ; R11.2 43.046,101.481 43.046,102.863 v1(43.053,102.87) ; v1(62.738,91.186) 62.745,91.179 63.873,91.179 R18.2 ; D3.2 68.111,92.895 68.111,96.242 68.645,96.776 68.836,96.776 C15.1 ; v1(74.295,103.759) 74.302,103.752 74.302,102.624 R14.2 ; R15.2 79.11,91.186 79.476,91.552 R17.2 81.101,91.552 81.601,92.052 81.667,92.052 81.901,92.286 81.901,94.955 82.296,95.35 v1(82.296,95.377) 82.289,95.37 81.235,95.37 81.161,95.37 R16.2 ; C4.1 78.559,102.71 79.735,103.886 v1(79.756,103.886)
+5V: C5.1 J1.1 R4.2 U2.5 U4.3 | length 19.5
  Top Layer w0.5: J1.1 35.547,99.614 36.312,100.379 36.312,100.723 37.027,101.438 37.246,101.438 ; v1(36.195,102.489) 37.246,101.438 ; v1(36.322,106.68) 36.33,106.672 36.33,105.29 R4.2 ; U2.5 44.717,98.044 44.446,98.315 44.272,98.315 41.511,101.075 41.511,101.259 41.321,101.448 38.238,101.448 C5.1 37.246,101.438
  Bottom Layer w0.5: v1(36.195,102.489) 36.195,106.526 36.322,106.653 v1(36.322,106.68)
ACC_SCL: R6.1 U1.42 U5.4 | length 14.5
  Top Layer w0.254: R6.1@48.372,96.012 R6.1 v1(48.387,97.028) 50.415,99.056 U1.42@52.353,99.056
  Bottom Layer w0.254: U5.4 41.355,97.671 41.998,97.028 v1(48.387,97.028)
ACC_SDA: R7.1 U1.43 U5.6 | length 16.6
  Top Layer w0.254: R7.1@50.277,96.012 R7.1 v1(50.292,97.028) 50.292,98.044 50.802,98.554 52.351,98.554 U1.43@52.353,98.556
  Bottom Layer w0.254: U5.6 39.235,96.896 40.627,95.504 48.768,95.504 v1(50.292,97.028)
CLK: CD1.5 D2.2 U1.15 U3.6 | length 27.4
  Top Layer w0.254: U1.15@59.153,97.056 62.149,97.056 63.875,98.782 CD1.5 ; v1(76.073,97.663) v1(72.81,97.663) 69.547,97.663 68.428,98.782 68.335,98.782 CD1.5@67.477,98.782 ; CD1.5 CD1.5@67.477,98.782 ; CD1.5 CD1.5@67.477,98.782
  Bottom Layer w0.254: 76.054,100.524 76.054,99.624 76.064,99.614 76.064,97.672 v1(76.073,97.663)
  Bottom Layer w0.5: D2.2 72.225,93.044 71.03,94.238 71.03,95.786 71.828,96.584 71.828,96.681 v1(72.81,97.663)
CS_MEM: R17.1 U1.13 U3.1 | length 25.8
  Top Layer w0.254: U1.13@59.153,96.056 62.814,96.056 66.911,91.959 77.735,91.959 v1(78.613,92.837)
  Bottom Layer w0.254: U3.1@78.594,94.724 78.604,94.714 78.604,92.846 v1(78.613,92.837) 81.011,92.837 R17.1
CS_SD: CD1.2 D5.2 R18.1 U1.14 | length 13.8
  Top Layer w0.254: U1.14@59.153,96.556 62.956,96.556 64.03,95.482 CD1.2
  Bottom Layer w0.5: R18.1 65.792,92.471 66.015,92.694 D5.2 66.015,94.386 v1(64.897,95.504)
DETECT: CD1.9 U1.18 | length 12.9
  Top Layer w0.254: U1.18@59.153,98.556 60.239,98.556 60.997,99.314 61.976,99.314 64.516,101.854 64.516,103.124 65.961,104.569 68.165,104.569 CD1.9
GND: +5V.2 C1.2 C2.2 C3.2 C4.2 C5.2 C6.2 C7.2 C8.2 C9.2 C10.2 C11.2 C12.2 C13.2 C14.2 C15.2 C16.2 C17.2 C18.2 C19.2 CD1.6 D1.1 D2.1 D3.1 D4.1 D5.1 D9.2 D10.2 D12.2 D15.2 J1.5 MEM.2 P1.2 R1.2 R8.1 SD.2 SW1.2 U1.8 U1.23 U1.35 U1.47 U1.49 U2.2 U3.4 U4.1 U5.5 U5.10 U5.12 uC.2 Y1.2 Y1.4 | length 25.3
  Top Layer w0.254: U1.47@52.353,96.556 53.503,96.556 v2(53.553,96.606) ; U1.35@53.503,102.206 53.503,101.056 v2(53.553,101.006) ; U1.8@56.503,95.406 56.503,96.256 v2(56.853,96.606) ; v2(57.953,101.006) 58.003,101.056 U1.23@59.153,101.056 ; CD1.6@66.977,99.822 CD1.6
  Top Layer w0.5: v1(30.353,105.283) +5V.2 ; J1.5 35.092,97.021 36.315,97.021 v1(36.322,97.028) ; C5.2 39.816,100.238 39.851,100.203 v1(39.878,100.203) ; U2.2 v1(43.307,98.044) ; SW1.2 v1(51.308,105.41) ; v1(50.165,100.33) C8.2 ; v1(52.578,92.71) 52.597,92.729 53.826,92.729 Y1.4 ; v1(56.007,90.043) 56.026,90.062 56.026,91.029 Y1.2 ; C9.2 C11.2 v1(60.452,92.964) ; uC.2 v1(64.86,91.63) ; v3(65.024,99.822) CD1.6@66.977,99.822 ; SD.2@72.099,105.791 v1(73.279,105.791) ; MEM.2@78.83,105.791 78.83,106.827 v1(78.842,106.839)
  other v1: 46.736,90.043 47.752,90.043 48.768,90.043 62.103,104.521 63.119,104.521
  other v2: 54.653,96.606 55.753,96.606 57.953,96.606 53.553,97.706 54.653,97.706 55.753,97.706 56.853,97.706 57.953,97.706 53.553,98.806 54.653,98.806 55.753,98.806 56.853,98.806 57.953,98.806 53.553,99.906 54.653,99.906 55.753,99.906 56.853,99.906 57.953,99.906 54.653,101.006 55.753,101.006 56.853,101.006
  other v3: 38.227,106.68
I2C_CPLT: I2C.2 U1.41 | length 9
  Top Layer w0.254: I2C.2@45.466,94.884 45.541,94.884 47.76,97.103 47.76,97.417 49.899,99.556 U1.41@52.353,99.556
MEM_CPLT: R12.2 U1.19 | length 19.9
  Top Layer w0.254: U1.19@59.476,99.056 60.097,99.056 60.916,99.875 61.402,99.875 v1(61.468,99.941) ; R12.2 74.422,105.806 v1(74.422,107.188)
  Bottom Layer w0.254: v1(61.468,99.941) 68.969,107.442 71.522,107.442 71.776,107.188 v1(74.422,107.188)
MISO: CD1.7 D1.2 U1.16 U3.2 | length 28.8
  Top Layer w0.254: U1.16@59.153,97.556 61.299,97.556 64.725,100.982 CD1.7 67.054,100.965 v1(69.596,100.965)
  Bottom Layer w0.254: v1(69.596,100.965) 71.501,100.965 74.369,98.097 74.752,98.097 77.324,95.525 U3.2@77.324,94.724
  Bottom Layer w0.5: D1.2 74.295,93.044 73.279,94.06 73.279,97.007 74.369,98.097
MOSI: CD1.3 D4.2 U1.17 U3.5 | length 24.9
  Top Layer w0.254: U1.17@59.153,98.056 60.589,98.056 61.131,98.598 v1(61.168,98.598) ; v1(64.516,96.647) 64.581,96.582 CD1.3 69.802,96.582 70.237,96.147 v1(70.33,96.147) ; v1(72.644,98.552) 74.79,100.698 74.79,101.46 v1(74.803,101.473)
  Bottom Layer w0.254: v1(61.168,98.598) 61.895,98.598 61.976,98.679 62.484,98.679 v1(64.516,96.647) ; v1(70.33,96.147) 70.33,96.238 v1(72.644,98.552) ; U3.5@74.728,99.568 74.794,99.633 74.794,101.464 v1(74.803,101.473)
  Bottom Layer w0.5: D4.2 70.205,92.919 70.205,93.844 70.33,93.969 v1(70.33,96.147)
NetC1_1: C1.1 U1.22 | length 4.9
  Top Layer w0.254: U1.22@59.153,100.556 59.155,100.558 59.664,100.558 59.793,100.687 60.313,100.687 60.444,100.556 61.196,100.556 61.208,100.568 61.469,100.568 63.171,102.27 C1.1
NetCD1_10: CD1.10 R5.1 | length 5.5
  Top Layer w0.254: CD1.10 76.052,104.137 76.57,104.655 76.57,104.71 76.762,104.902 79.868,104.902 80.409,105.443 80.484,105.443 80.757,105.716 R5.1
NetD8_1: +5V.1 R4.1 | length 1.5
  Top Layer w0.254: +5V.1@33.491,105.283 R4.1
NetD9_1: 3V3.1 D9.1 | length 1.4
  Top Layer w0.254: D9.1@42.672,92.165 3V3.1@42.672,93.584
NetD10_1: D10.1 R11.1 | length 2
  Bottom Layer w0.254: R11.1 44.412,101.399 D10.1
NetD11_1: MEM.1 R12.1 | length 1.7
  Top Layer w0.254: R12.1 MEM.1@77.38,105.791
NetD12_1: D12.1 I2C.1 | length 1.4
  Top Layer w0.254: D12.1@45.466,92.165 I2C.1@45.466,93.584
NetD13_1: R9.1 SD.1 | length 1.5
  Top Layer w0.254: R9.1 SD.1
NetD14_1: R10.1 uC.1 | length 1.9
  Top Layer w0.254: R10.1 63.395,90.282 uC.1@63.41,90.297
NetD15_1: D15.1 R14.1 | length 1.8
  Bottom Layer w0.254: D15.1@71.247,102.616 R14.1
NetR1_1: R1.1 U1.44 | length 7.8
  Top Layer w0.254: R1.1 v1(48.387,93.599) ; v1(51.181,97.79) 51.275,97.79 51.541,98.056 52.353,98.056 U1.44@52.351,98.054
  Bottom Layer w0.254: v1(48.387,93.599) 51.181,96.393 v1(51.181,97.79)
NetR8_2: R8.2 U5.7 | length 2
  Bottom Layer w0.254: U5.7 38.735,95.011 R8.2
NetR15_1: R15.1 U3.3 | length 3.6
  Bottom Layer w0.254: U3.3@76.087,94.691 76.054,94.658 76.054,91.317 R15.1
NetR16_1: R16.1 U3.7 | length 5.6
  Bottom Layer w0.254: U3.7@77.324,99.624 77.324,98.724 79.386,96.662 R16.1
NRST: C16.1 R3.2 SW1.1 U1.7 | length 19.2
  Top Layer w0.254: U1.7@56.005,95.404 56.005,94.933 56.388,94.55 v1(56.388,94.456) ; SW1.1 SW1.1@58.509,105.41 ; v1(59.055,103.886) 59.055,104.864 SW1.1@58.509,105.41 ; C16.1 62.412,106.899 61.162,105.649 R3.2 60.848,105.41 SW1.1@58.509,105.41
  Bottom Layer w0.254: v1(56.388,94.456) 56.388,94.488 57.361,95.461 57.624,95.461 59.182,97.019 59.182,100.342 59.055,100.469 v1(59.055,103.886)
OSC_IN: C10.1 U1.5 Y1.1 | length 7.2
  Top Layer w0.254: C10.1 53.475,90.678 Y1.1 54.034,91.137 55.003,92.106 U1.5@55.003,95.406
OSC_OUT: C9.1 U1.6 Y1.3 | length 5.9
  Top Layer w0.254: U1.6@55.503,95.406 55.503,94.538 55.761,94.28 55.761,94.191 56.134,93.818 Y1.3 56.234,92.837 57.943,91.128 58.08,91.128 58.328,90.88 C9.1
SD_CPLT: R9.2 U1.20 | length 10.8
  Top Layer w0.254: U1.20@59.476,99.558 59.622,99.558 60.013,99.949 v1(60.103,99.949) ; v1(66.294,105.791) R9.2
  Bottom Layer w0.254: v1(60.103,99.949) 60.197,99.949 60.374,100.127 60.376,100.127 65.974,105.725 66.228,105.725 v1(66.294,105.791)
SWCLK: P1.4 U1.37 | length 21.7
  Top Layer w0.254: v1(51.054,100.457) 51.12,100.523 51.12,101.031 51.645,101.556 U1.37@52.353,101.556
  Bottom Layer w0.254: P1.4 42.103,90.805 42.738,91.44 47.115,91.44 51.808,96.133 51.808,99.703 v1(51.054,100.457)
SWDIO: P1.3 U1.34 | length 27.5
  Top Layer w0.254: v1(53.613,103.156) 54.001,102.768 54.001,102.606 U1.34@54.001,102.529
  Bottom Layer w0.254: P1.3 37.551,89.703 41.643,89.703 42.926,90.986 47.303,90.986 52.262,95.945 52.262,101.919 53.34,102.997 53.42,102.997 53.579,103.156 v1(53.613,103.156)
uC_ON: R10.2 U1.12 | length 6.2
  Top Layer w0.254: U1.12@58.503,95.431 58.503,94.786 58.958,94.331 60.863,94.331 61.468,93.726 R10.2
USB_CONN_N: J1.2 U2.1 | length 7.7
  Top Layer w0.254: J1.2 35.158,98.891 35.757,98.891 35.782,98.866 37.921,98.866 38.516,98.271 41.281,98.271 41.43,98.42 41.43,98.438 41.609,98.618 ; 41.61,98.618 41.986,98.994 U2.1
USB_CONN_P: J1.3 U2.3 | length 7.7
  Top Layer w0.254: J1.3 35.158,98.387 35.757,98.387 35.782,98.412 37.733,98.412 38.328,97.817 41.281,97.817 41.43,97.668 41.43,97.65 41.609,97.47 ; 41.61,97.47 41.986,97.094 U2.3
USB_N: U1.32 U2.6 | length 16.2
  Top Layer w0.15: U2.6 45.136,98.994 45.64,98.49 45.64,98.307 45.728,98.219 46.233,98.219 48.164,100.15 48.164,103.173 49.354,104.363 53.612,104.363 53.849,104.126 53.992,104.126 54.928,103.19 54.928,102.583 55.003,102.508 U1.32@55.003,102.206
USB_P: U1.33 U2.4 | length 15.7
  Top Layer w0.15: U2.4 45.136,97.094 45.64,97.598 45.64,97.781 45.728,97.869 46.378,97.869 48.514,100.005 48.514,103.028 49.499,104.013 53.467,104.013 53.704,103.776 53.847,103.776 54.578,103.045 54.578,102.583 54.503,102.508 U1.33@54.503,102.206
pads on no net: CD1.1 CD1.8 CD1.11 CD1.12 CD1.13 CD1.14 J1.4 J1.6 J1.7 J1.8 J1.9 J1.10 J1.11 U1.2 U1.3 U1.4 U1.10 U1.11 U1.21 U1.25 U1.26 U1.27 U1.28 U1.29 U1.30 U1.31 U1.38 U1.39 U1.40 U1.45 U1.46 U5.2 U5.3 U5.8 U5.9 U5.11 U5.13 U5.15 U5.16

## Polygon pours and split planes (outlines as drawn)
3V3 on Top Layer "3V3_L01_P004" (solid, pour order 4): 29.591,108.458 82.804,108.458 82.804,88.9 29.591,88.9
GND on Top Layer "GND_L01_P003" (solid, pour order 3): 37.211,104.394 41.91,104.394 41.91,107.442 39.497,107.442 37.211,107.442 37.211,105.664
GND on Top Layer "GND_L01_P002" (solid, pour order 2): 46.99,91.186 46.99,91.821 49.403,91.821 49.403,93.726 51.181,93.726 51.181,89.535 41.91,89.535 41.91,91.186 42.037,91.186 41.91,91.186 42.037,91.186
GND on Top Layer "GND_L01_P001" (solid, pour order 1): 59.944,102.997 64.008,102.997 64.008,106.299 62.484,106.299 61.722,104.902 59.944,104.394
GND on Bottom Layer "GND_L02_P000" (solid, pour order 0): 29.591,108.458 82.804,108.458 82.804,88.9 29.591,88.9

## Silkscreen, mask and mechanical layers (free items; w line width, h text height)
Top Overlay:
  text "3V3" at 30.426,92.656 h0.6
  text "GND" at 33.093,92.656 h0.6
  text "IO" at 36.014,92.656 h0.6
  text "CLK" at 38.3,92.656 h0.6

## Text inside footprints (layer, text, board x,y; h text height)
J1: Mechanical 1 "PCB EDGE" at 30.835,105.514 h0.3 r270
U2: Top 3D Body "*" at 42.748,98.222 h1.27